# EAGLE board MEMS-preamp copy (EAGLE 7.6.0)
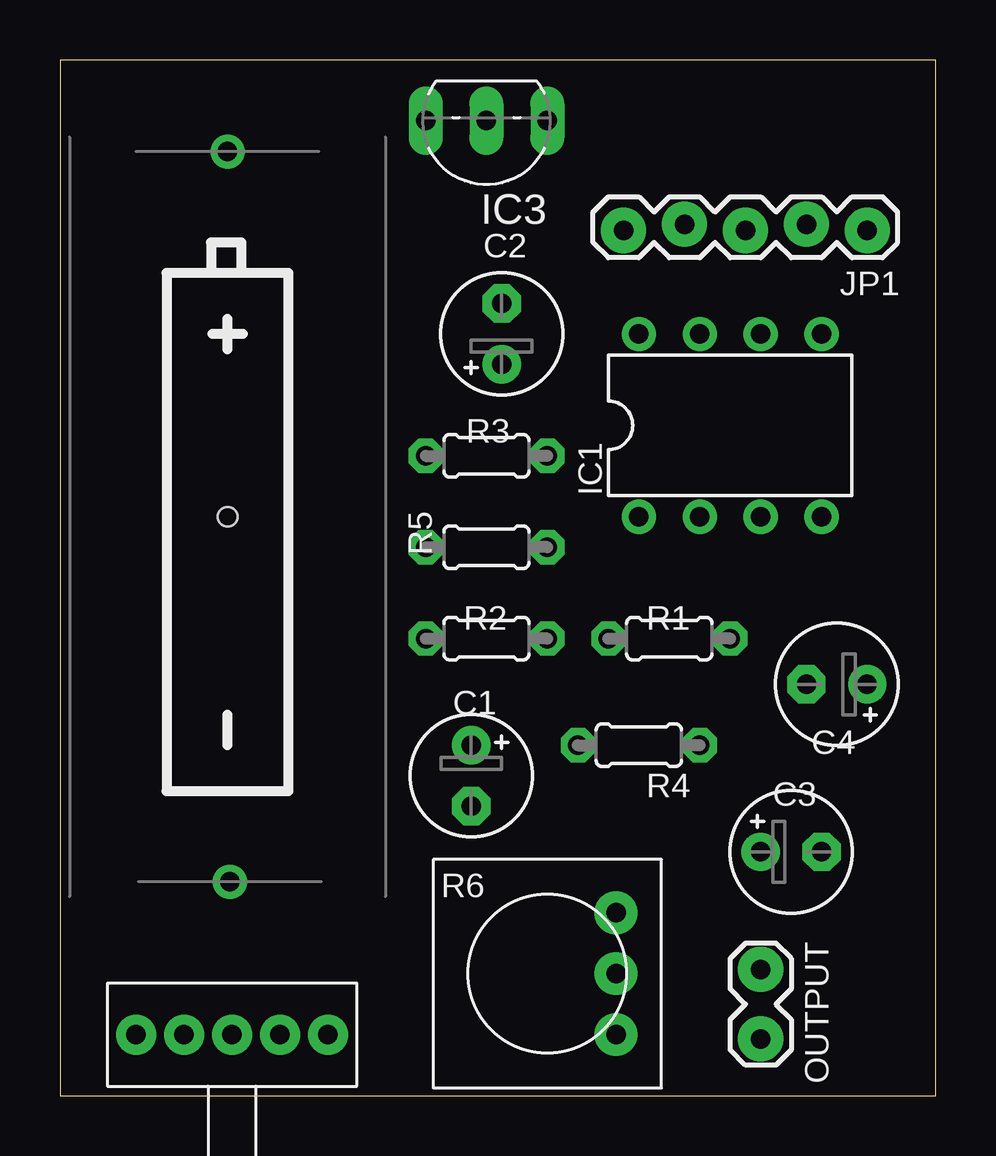
[diagram p0: board, top side]
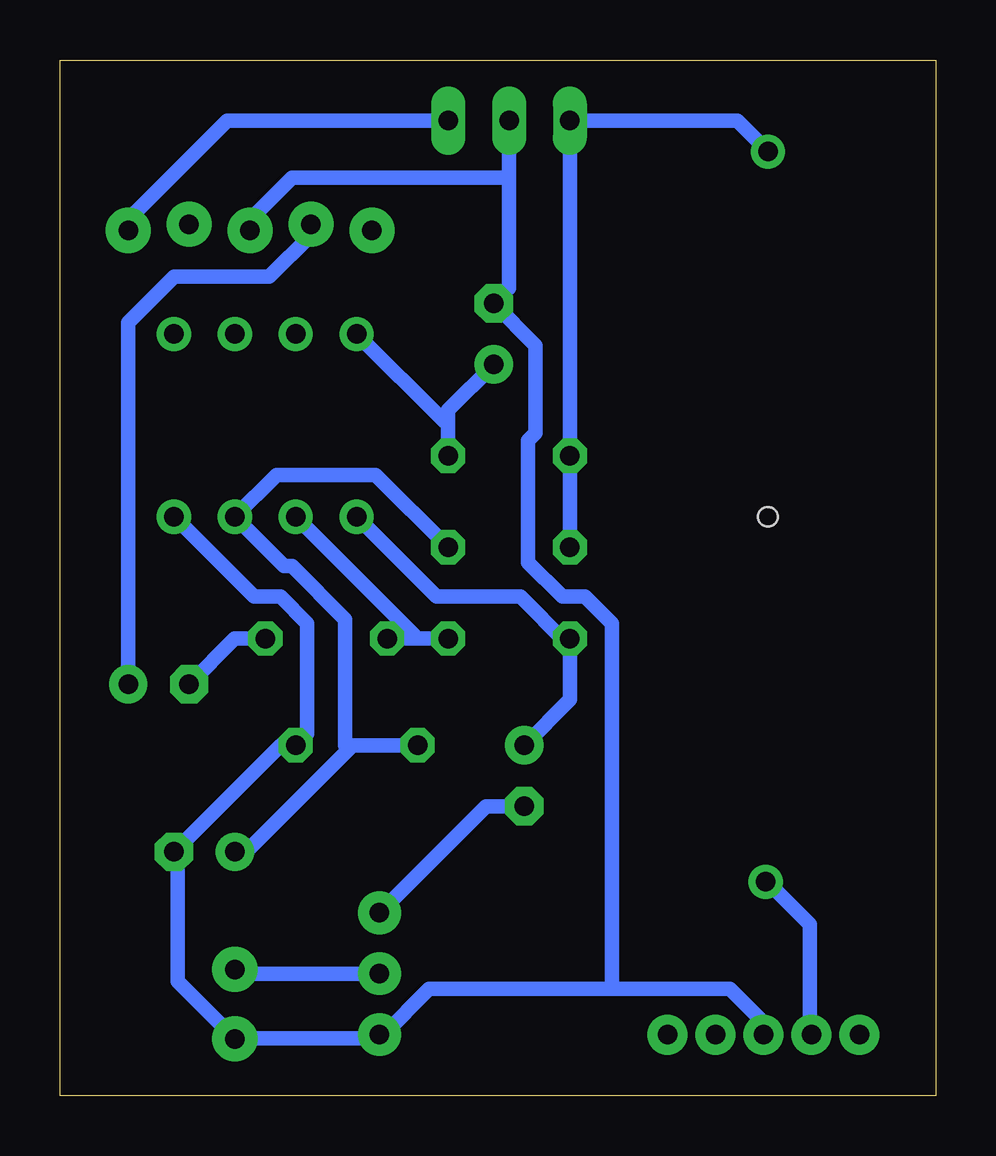
[diagram p1: board, bottom side, seen from below]

Size 36.5 x 43.17 mm. Coordinates in mm from the lower left corner, seen from the top.
Outline: 0,0 36.5,0 36.5,43.17 0,43.17 0,0
Copper layers (1*16): Top 0.035mm / dielectric 1.5mm / Bottom 0.035mm
Design rules "default *": minimum track width 24mil, minimum drill 24mil, track to track 24mil, track to pad 24mil, pad to pad 24mil, via to via 24mil, smd to smd 24mil, copper to edge 40mil, drill to drill 24mil, minimum pad ring 12mil, minimum via ring 12mil, stop-mask expansion 4mil, vias tented up to drill 0mil, thermal gap 10mil
Net classes: 0 default: drill 0.813 mm

## Footprints (pad centres in the part's own frame; a part is rotated, then mirrored left to right if it is on the bottom)
BATTERY-A23 = drill 0.813: GND@1 15.22,0.1; PWR@1 -15.22,0 | hole 0.813: 0,0
E2,5-5 = drill 0.813 pad 1.6: + -1.27,0 | drill 0.813 pad 1.6 octagon: - 1.27,0
DIL08 = drill 0.813 pad 1.27: 1 -3.81,-3.81; 2 -1.27,-3.81; 3 1.27,-3.81; 4 3.81,-3.81; 5 3.81,3.81; 6 1.27,3.81; 7 -1.27,3.81; 8 -3.81,3.81
TO92- = drill 0.813 long: 1 2.54,0; 2 0,0; 3 -2.54,0
1X05_LOCK = drill 0.813 pad 1.88: 1 0,0.127; 2 2.54,-0.127; 3 5.08,0.127; 4 7.62,-0.127; 5 10.16,0.127
SPDT-SWITCH = drill 0.813 pad 1.676: 1 2,0; 2 4,0; 3 6,0; P$1 0,0; P$2 8,0
1X02_LOCK = drill 0.813 pad 1.88: 1 -0.178,0; 2 2.718,0
0204/5 = drill 0.813 octagon: 1 -2.54,0; 2 2.54,0
TRIM-3386 = drill 0.813 pad 1.778: 1 -2.54,-2.857; 2 0,-2.857; 3 2.54,-2.857

## Placement (x,y rotation side)
BAT1  [BATTERY-A23]  6.99,24.13 270 top
C1  10u  [E2,5-5]  17.14,13.34 270 top
C2  100u  [E2,5-5]  18.41,31.75 90 top
C3  0.1u  [E2,5-5]  30.48,10.16 0 top
C4  10u  [E2,5-5]  32.38,17.14 180 top
IC1  OPA2134PA  [DIL08]  27.94,27.94 0 top
IC3  78  [TO92-]  17.78,40.64 180 top
JP1  [1X05_LOCK]  33.66,36.2 180 top
ON/OFF  labl  [SPDT-SWITCH]  3.17,2.54 0 top
OUTPUT  [1X02_LOCK]  29.21,5.08 270 top
R1  1K  [0204/5]  25.4,19.05 180 top
R2  100K  [0204/5]  17.78,19.05 180 top
R3  10  [0204/5]  17.78,26.67 180 top
R4  47K  [0204/5]  24.13,14.61 180 top
R5  47K  [0204/5]  17.78,22.86 180 top
R6  10K  [TRIM-3386]  20.32,5.08 90 top

## Library data of the parts
BAT1 ON/OFF = Daniel
C1-C4 = rcl
IC1 = linear; IC_NAME: TL072
IC3 R1-R5 = CMU-ArtFab
JP1 = SparkFun-Connectors; CON1: Vin; CON2: 3V; CON3: GND; CON4: AC; CON5: DC
OUTPUT = SparkFun-Connectors
R6 = adafruit

## Nets
+5V: IC3.3 JP1.1
GND: C2.- C3.- IC1.4 IC3.2 JP1.3 ON/OFF.2 OUTPUT.2 R4.1 R6.1
N$1: C2.+ IC1.8 R3.1
N$2: BAT1.GND@1 ON/OFF.1
N$3: C4.+ JP1.4
N$4: C4.- R1.1
N$5: IC1.2 R1.2 R2.1
N$6: C1.- R6.3
N$7: OUTPUT.1 R6.2
N$8: C3.+ IC1.3 R4.2 R5.1
N$9: C1.+ IC1.1 R2.2
VBAT: BAT1.PWR@1 IC3.1 R3.2 R5.2

## Tracks (layer width: path | path; a pad name or v marks a point on that pad's centre or on a via)
+5V
  Bottom 0.61: IC3.3 29.53,40.64 33.66,36.51 JP1.1
GND
  Bottom 0.61: IC1.4 28.42,20.8 27.3,20.8 26.19,19.68 26.19,15.08 R4.1 27.3,14.61 C3.- 31.59,10 31.59,4.76 29.37,2.54 OUTPUT.2 29.21,2.38 23.34,2.38 R6.1 23.02,2.54 21.11,4.45 13.49,4.45 | 17.78,38.26 17.78,33.66 C2.- 16.67,31.27 16.67,27.62 16.99,27.3 16.99,22.23 15.56,20.8 14.61,20.8 13.49,19.68 13.49,4.45 | 17.78,38.26 IC3.2 | JP1.3 28.57,36.51 26.83,38.26 17.78,38.26 | 13.49,4.45 8.57,4.45 7.3,3.17 7.3,2.54 ON/OFF.2
N$1
  Bottom 0.61: 20.32,28.1 20.32,28.57 C2.+ | 20.32,28.1 R3.1 | IC1.8 20.48,28.1 20.32,28.1
N$2
  Bottom 0.61: ON/OFF.1 5.24,2.54 5.24,7.14 6.99,8.89 BAT1.GND@1
N$3
  Bottom 0.61: C4.+ 33.66,32.23 31.75,34.13 27.78,34.13 26.04,35.88 JP1.4
N$4
  Bottom 0.61: R1.1 29.21,19.05 C4.-
N$5
  Bottom 0.61: R1.2 21.75,19.05 | 21.75,19.05 R2.1 | IC1.2 21.75,19.21 21.75,19.05
N$6
  Bottom 0.61: C1.- 18.73,12.06 R6.3
N$7
  Bottom 0.61: R6.2 29.05,5.08 29.21,5.24 OUTPUT.1
N$8
  Bottom 0.61: R5.1 23.34,25.88 27.46,25.88 IC1.3 27.15,22.07 26.83,22.07 24.61,19.84 24.61,14.61 24.45,14.45 | R4.2 24.29,14.61 24.45,14.45 | 24.45,14.45 28.73,10.16 C3.+
N$9
  Bottom 0.61: C1.+ 15.24,16.51 R2.2 15.4,18.89 17.3,20.8 20.8,20.8 IC1.1
VBAT
  Bottom 0.61: R5.2 R3.2 IC3.1 8.26,40.64 6.99,39.37 BAT1.PWR@1